# Altium PCB PCB1.PcbDoc
Units mil, origin at the board's own origin, x right, y up, seen from the top; angles counter-clockwise.
Board outline 6000 x 4000 mil, 2 copper layers (Top Layer, Bottom Layer); 1 components, 0 nets, 116 pads, 0 vias.
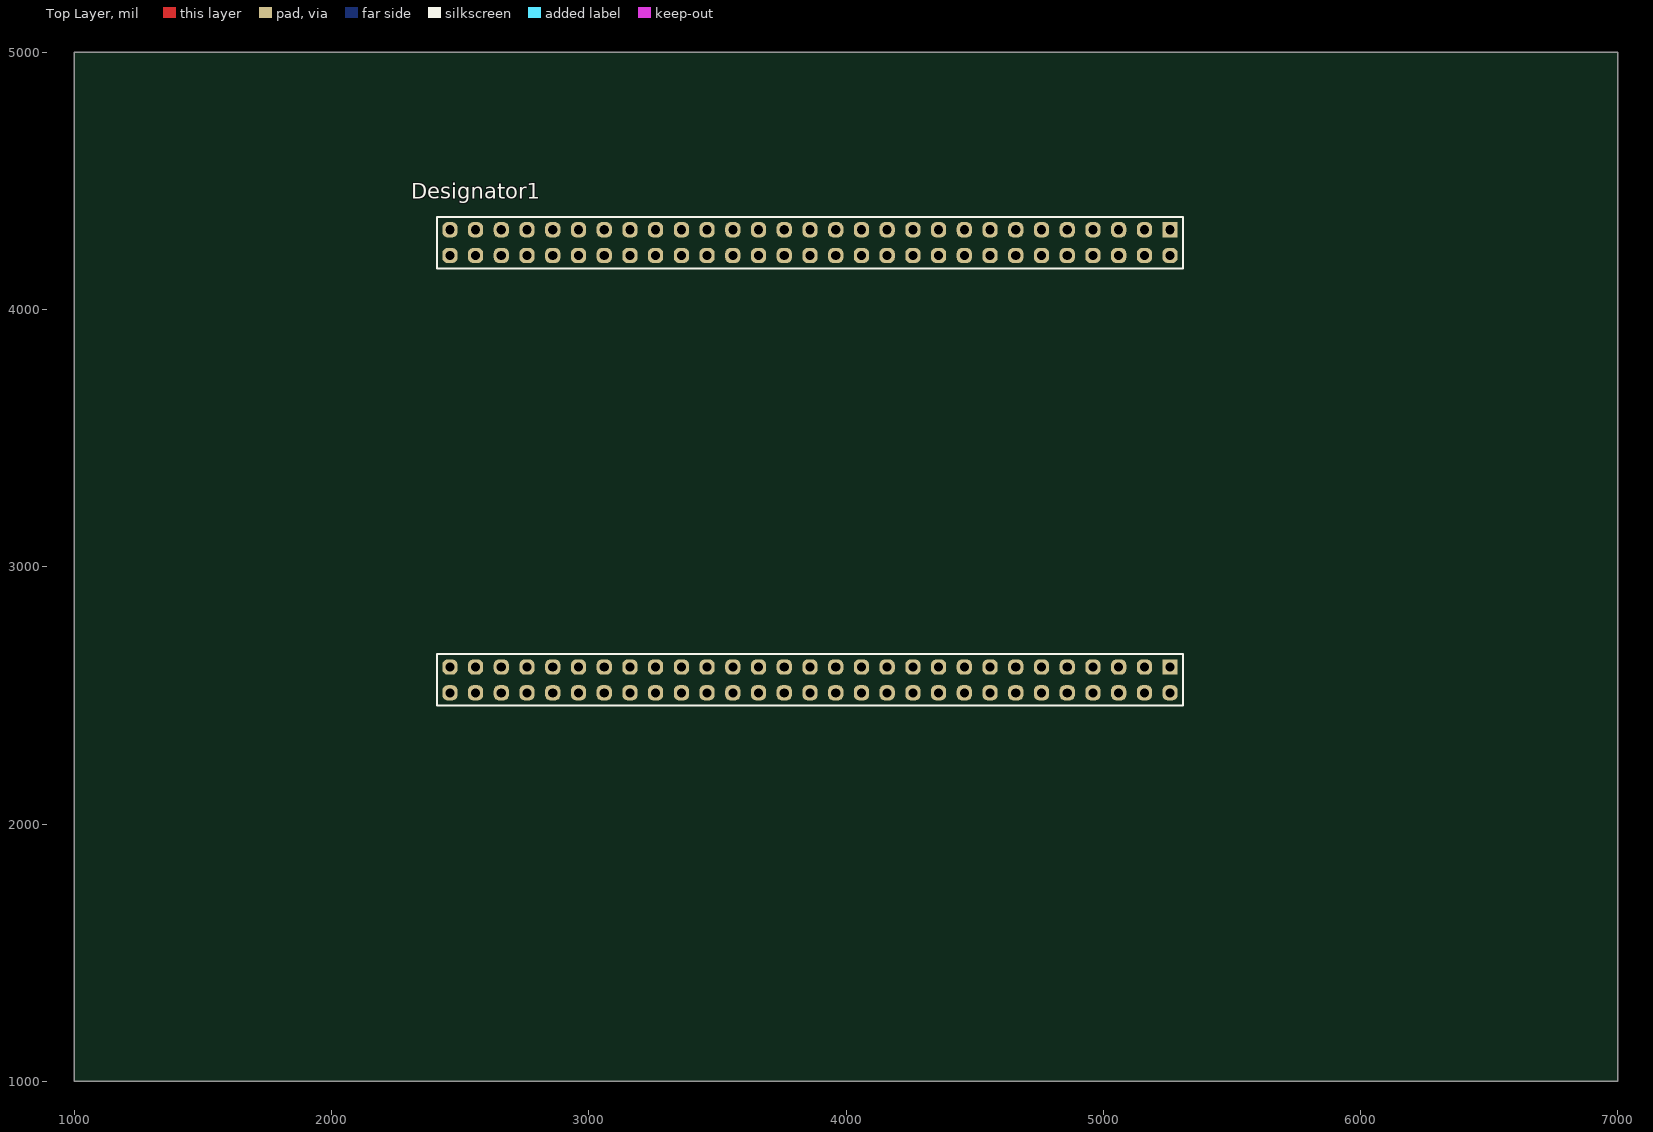
[diagram p0: Top Layer view]
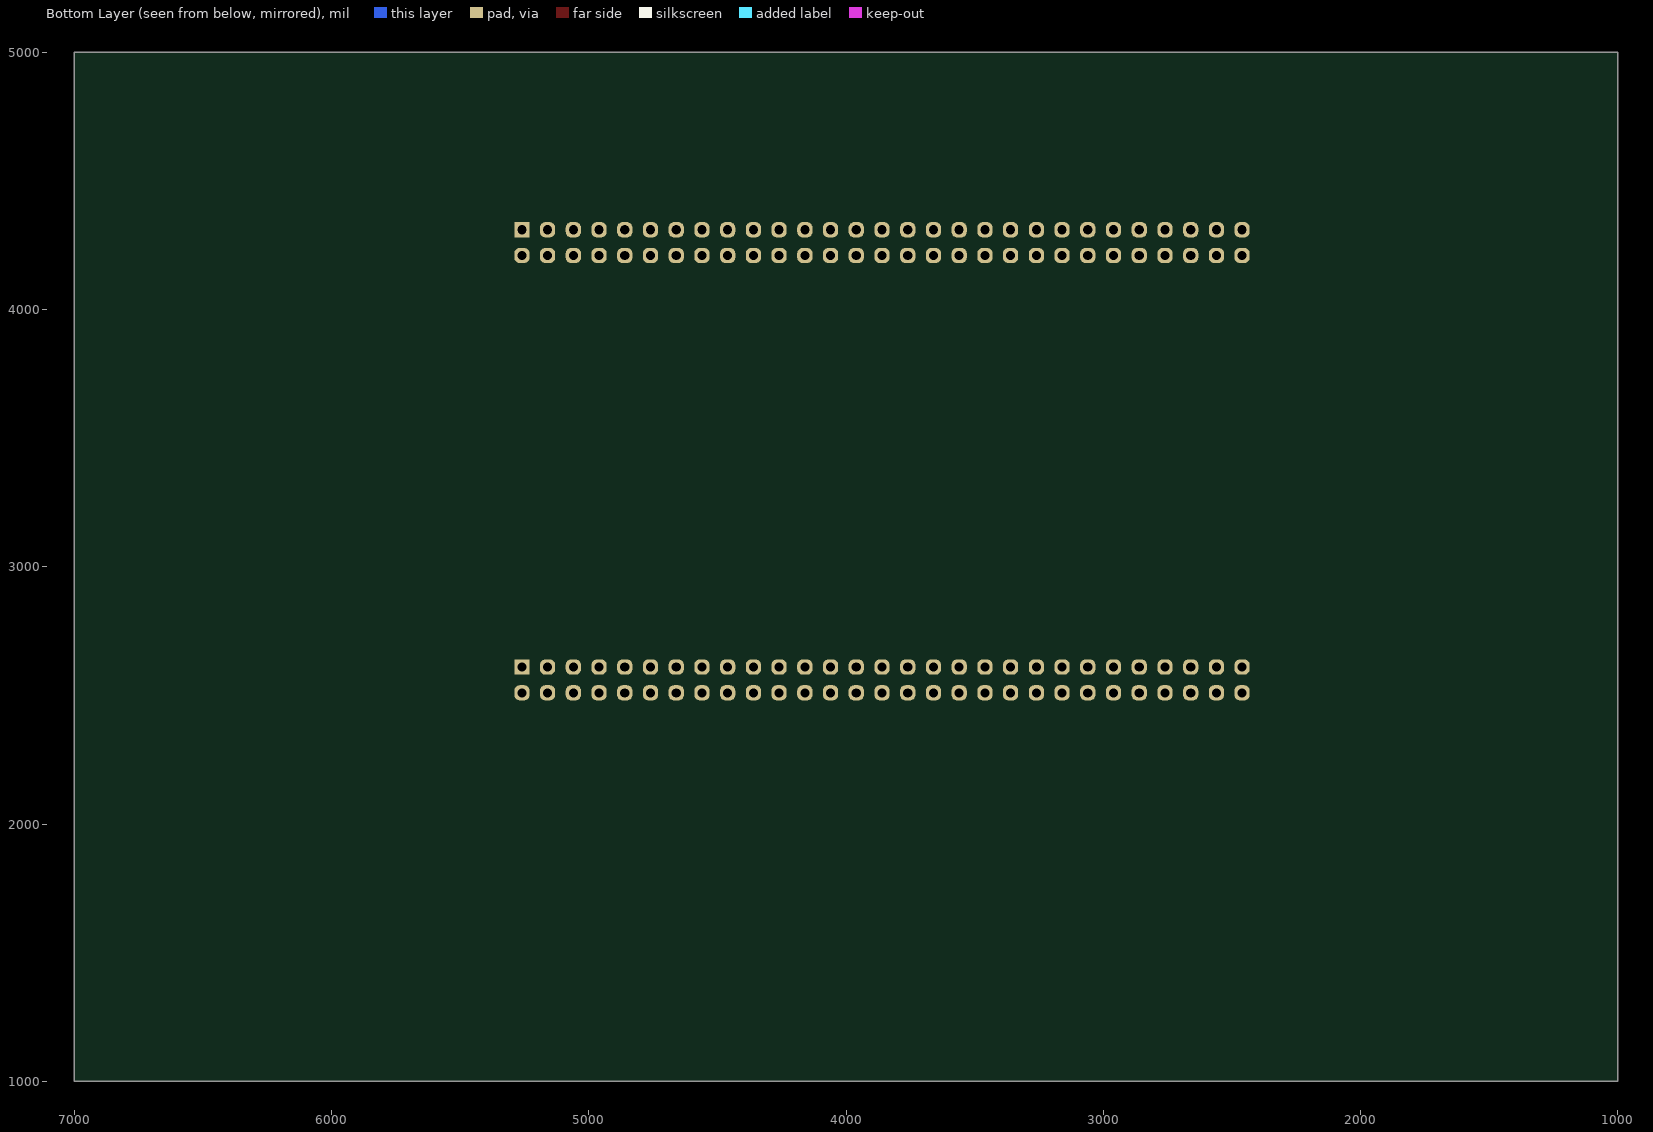
[diagram p1: Bottom Layer view, seen from below]

## Layer stack, top to bottom
Top Solder: solder mask 0.4, Solder Resist, Dk 3.5
Top Layer: signal copper 1.4
Dielectric 1: dielectric 12.6, FR-4, Dk 4.8
Bottom Layer: signal copper 1.4
Bottom Solder: solder mask 0.4, Solder Resist, Dk 3.5

## Board outline
1000,1000 7000,1000 7000,5000 1000,5000

## Design rules (kind name [scope] priority, off if disabled: settings)
Clearance [All] p1: gap=10 ignorepadtopadclearanceinfootprint=FALSE except(0: Arc-Hole Track-Hole SMDPad-Hole THPad-Hole Via-Hole Fill-Hole Poly-Hole Region-Hole Text-Hole)
PolygonConnect [All] p1: connectstyle=Relief reliefconductorwidth=10 reliefentries=4 polygonreliefangle="90 Angle" airgapwidth=10
RoutingVias [All] p1: holewidth=28 width=50 viastyle="Through Hole" minholewidth=28 minwidth=50 maxholewidth=28 maxwidth=50
SolderMaskExpansion [All] p1: expansion=4 istentingtop=FALSE
Width [All] p1: maxlimit=10 minlimit=10 preferedwidth=10
30 further rules are at their usual default settings.

## Components (designator, comment, footprint, x,y, rotation, side; value= is the part's Value field where it differs from the comment)
Designator1 "Comment" MSAS-A4-PCBLIB-V1R20 3860,3410 r0 top

## Footprints (in the part's own frame and the unit in brackets; to place one, negate y for a bottom-side part, rotate by r counter-clockwise, add the part's x,y. Pads: shape width x height; smd on the part's side, far side on the other; paste and mask are expansions set on the pad)
MSAS-A4-PCBLIB-V1R20 [mm]
  rect 1.5x1.5 hole 0.9: 1(35.56,22.86) 59(35.56,-20.32)
  rrect70% 1.5x1.5 hole 0.9: 2(35.56,20.32) 3(33.02,22.86) 4(33.02,20.32) 5(30.48,22.86) 6(30.48,20.32) 7(27.94,22.86) 8(27.94,20.32) 9(25.4,22.86) 10(25.4,20.32) 11(22.86,22.86) 12(22.86,20.32) 13(20.32,22.86) 14(20.32,20.32) 15(17.78,22.86) 16(17.78,20.32) 17(15.24,22.86) 18(15.24,20.32) 19(12.7,22.86) 20(12.7,20.32) 21(10.16,22.86) 22(10.16,20.32) 23(7.62,22.86) 24(7.62,20.32) 25(5.08,22.86) 26(5.08,20.32) 27(2.54,22.86) 28(2.54,20.32) 29(0,22.86) 30(0,20.32) 31(-2.54,22.86) 32(-2.54,20.32) 33(-5.08,22.86) 34(-5.08,20.32) 35(-7.62,22.86) 36(-7.62,20.32) 37(-10.16,22.86) 38(-10.16,20.32) 39(-12.7,22.86) 40(-12.7,20.32) 41(-15.24,22.86) 42(-15.24,20.32) 43(-17.78,22.86) 44(-17.78,20.32) 45(-20.32,22.86) 46(-20.32,20.32) 47(-22.86,22.86) 48(-22.86,20.32) 49(-25.4,22.86) 50(-25.4,20.32) 51(-27.94,22.86) 52(-27.94,20.32) 53(-30.48,22.86) 54(-30.48,20.32) 55(-33.02,22.86) 56(-33.02,20.32) 57(-35.56,22.86) 58(-35.56,20.32) 60(35.56,-22.86) 61(33.02,-20.32) 62(33.02,-22.86) 63(30.48,-20.32) 64(30.48,-22.86) 65(27.94,-20.32) 66(27.94,-22.86) 67(25.4,-20.32) 68(25.4,-22.86) 69(22.86,-20.32) 70(22.86,-22.86) 71(20.32,-20.32) 72(20.32,-22.86) 73(17.78,-20.32) 74(17.78,-22.86) 75(15.24,-20.32) 76(15.24,-22.86) 77(12.7,-20.32) 78(12.7,-22.86) 79(10.16,-20.32) 80(10.16,-22.86) 81(7.62,-20.32) 82(7.62,-22.86) 83(5.08,-20.32) 84(5.08,-22.86) 85(2.54,-20.32) 86(2.54,-22.86) 87(0,-20.32) 88(0,-22.86) 89(-2.54,-20.32) 90(-2.54,-22.86) 91(-5.08,-20.32) 92(-5.08,-22.86) 93(-7.62,-20.32) 94(-7.62,-22.86) 95(-10.16,-20.32) 96(-10.16,-22.86) 97(-12.7,-20.32) 98(-12.7,-22.86) 99(-15.24,-20.32) 100(-15.24,-22.86) 101(-17.78,-20.32) 102(-17.78,-22.86) 103(-20.32,-20.32) 104(-20.32,-22.86) 105(-22.86,-20.32) 106(-22.86,-22.86) 107(-25.4,-20.32) 108(-25.4,-22.86) 109(-27.94,-20.32) 110(-27.94,-22.86) 111(-30.48,-20.32) 112(-30.48,-22.86) 113(-33.02,-20.32) 114(-33.02,-22.86) 115(-35.56,-20.32) 116(-35.56,-22.86)
  silkscreen extent -36.83,-24.13 36.83,24.13

## Nets (pads, with @x,y where several pads share a name; then routed paths per layer and width w, separated by ;. In a path a pad name is that pad's centre, name@x,y a point inside that pad or via, vN(x,y) a via of type N, cw(c..) or ccw(c..) an arc to the next point about the centre after c; other vN are vias at no path point)
pads on no net: Designator1.1 Designator1.2 Designator1.3 Designator1.4 Designator1.5 Designator1.6 Designator1.7 Designator1.8 Designator1.9 Designator1.10 Designator1.11 Designator1.12 Designator1.13 Designator1.14 Designator1.15 Designator1.16 Designator1.17 Designator1.18 Designator1.19 Designator1.20 Designator1.21 Designator1.22 Designator1.23 Designator1.24 Designator1.25 Designator1.26 Designator1.27 Designator1.28 Designator1.29 Designator1.30 Designator1.31 Designator1.32 Designator1.33 Designator1.34 Designator1.35 Designator1.36 Designator1.37 Designator1.38 Designator1.39 Designator1.40 Designator1.41 Designator1.42 Designator1.43 Designator1.44 Designator1.45 Designator1.46 Designator1.47 Designator1.48 Designator1.49 Designator1.50 Designator1.51 Designator1.52 Designator1.53 Designator1.54 Designator1.55 Designator1.56 Designator1.57 Designator1.58 Designator1.59 Designator1.60 Designator1.61 Designator1.62 Designator1.63 Designator1.64 Designator1.65 Designator1.66 Designator1.67 Designator1.68 Designator1.69 Designator1.70 Designator1.71 Designator1.72 Designator1.73 Designator1.74 Designator1.75 Designator1.76 Designator1.77 Designator1.78 Designator1.79 Designator1.80 Designator1.81 Designator1.82 Designator1.83 Designator1.84 Designator1.85 Designator1.86 Designator1.87 Designator1.88 Designator1.89 Designator1.90 Designator1.91 Designator1.92 Designator1.93 Designator1.94 Designator1.95 Designator1.96 Designator1.97 Designator1.98 Designator1.99 Designator1.100 Designator1.101 Designator1.102 Designator1.103 Designator1.104 Designator1.105 Designator1.106 Designator1.107 Designator1.108 Designator1.109 Designator1.110 Designator1.111 Designator1.112 Designator1.113 Designator1.114 Designator1.115 Designator1.116